# EAGLE board SrcBackplane01_7slots (EAGLE 7.7.0)
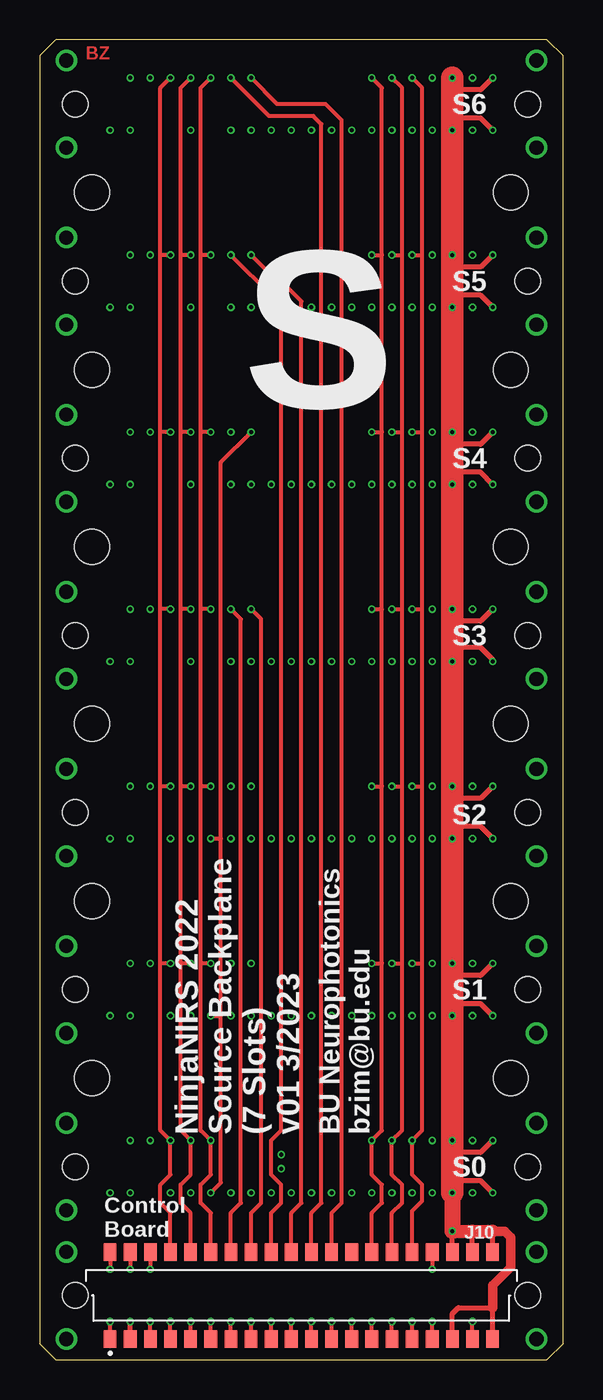
[diagram p0: board, top side]
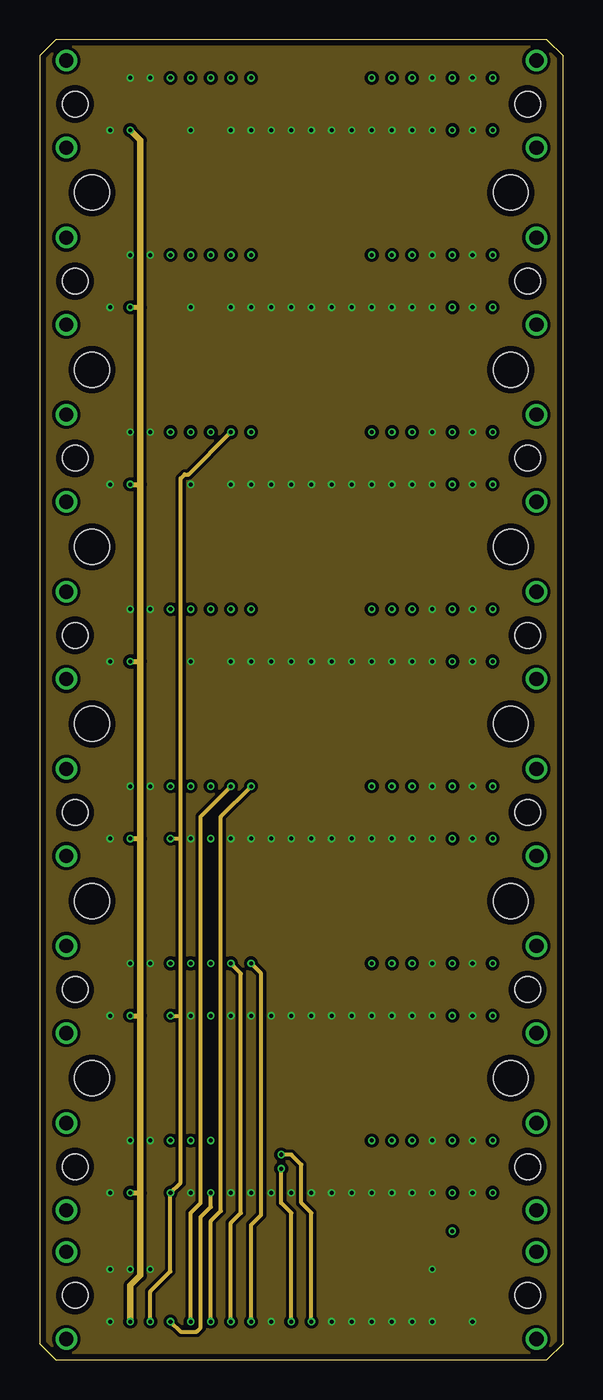
[diagram p1: board, inner layer Route2]
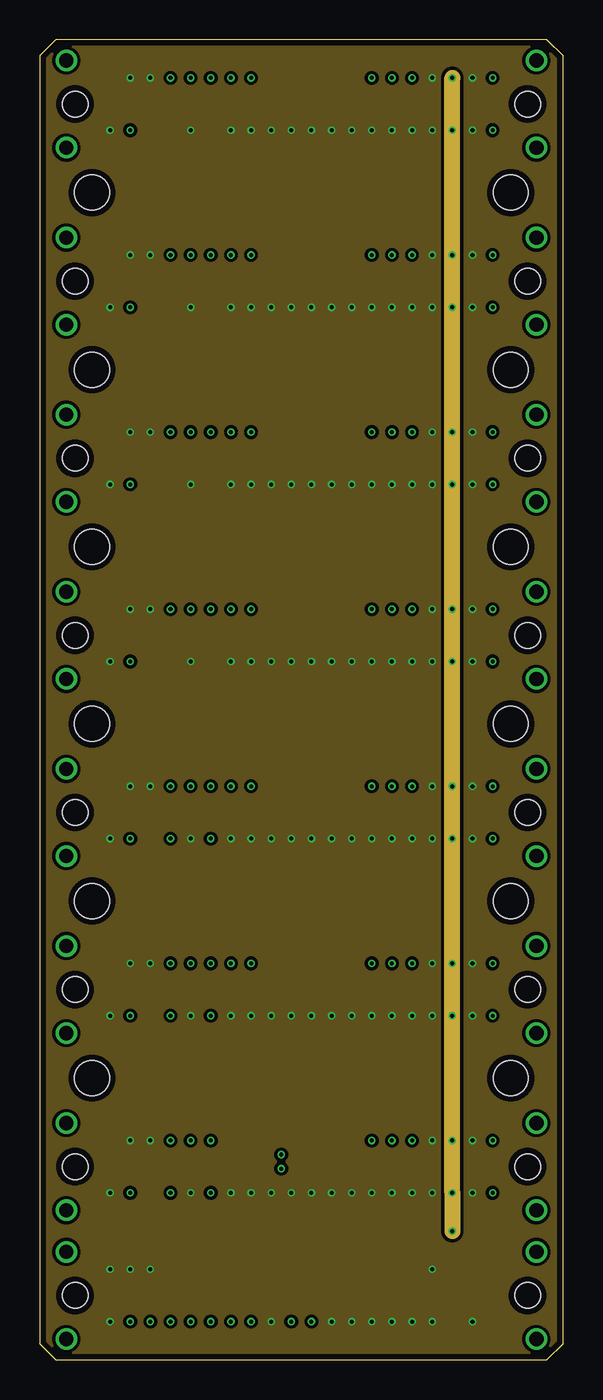
[diagram p2: board, inner layer Route15]
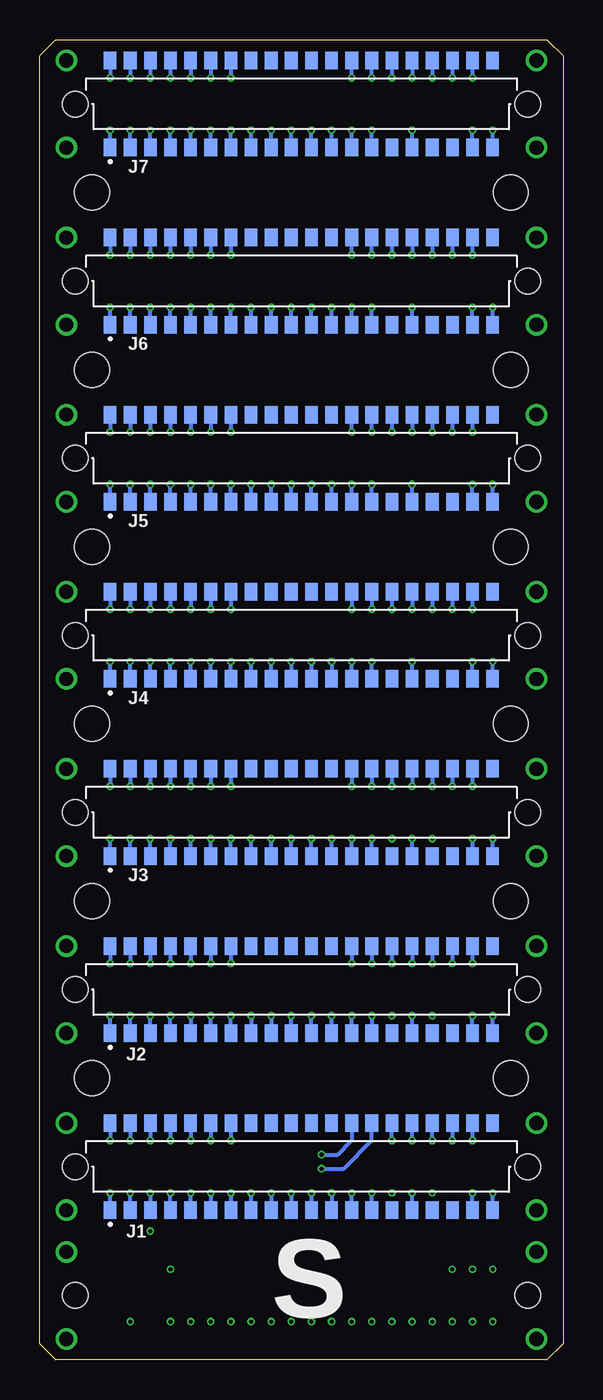
[diagram p3: board, bottom side, seen from below]

Size 33.02 x 83.31 mm. Coordinates in mm from the lower left corner, seen from the top.
Outline: 0,82.3 0,1.02 1.02,0 32,0 33.02,1.02 33.02,82.3 32,83.31 1.02,83.31 0,82.3
Copper layers (1*2*15*16): Top 0.035559375mm / dielectric 0.17018125mm / Route2 0.01778125mm / dielectric 47mil / Route15 0.01778125mm / dielectric 0.17018125mm / Bottom 0.035559375mm
Design rules "OSHPark-4layer *": minimum track width 5mil, minimum drill 10mil, track to track 5mil, track to pad 5mil, pad to pad 5mil, via to via 5mil, smd to smd 5mil, copper to edge 15mil, drill to drill 6mil, minimum pad ring 4mil, minimum via ring 4mil, stop-mask expansion 2.5mil, vias tented up to drill 12mil, thermal gap 10mil
Holes 2.2 mm at 3.3,40.13 3.3,28.96 3.3,17.78 29.72,40.13 29.72,28.96 29.72,17.78 29.72,51.31 29.72,62.48 29.72,73.66 3.3,51.31 3.3,62.48 3.3,73.66

## Footprints (pad centres in the part's own frame; a part is rotated, then mirrored left to right if it is on the bottom)
M20X2_HARFLEX_F_STR_MPTH = smd 0.8 x 1.1: A1 12.065,2.75; A2 10.795,2.75; A3 9.525,2.75; A4 8.255,2.75; A5 6.985,2.75; A6 5.715,2.75; A7 4.445,2.75; A8 3.175,2.75; A9 1.905,2.75; A10 0.635,2.75; A11 -0.635,2.75; A12 -1.905,2.75; A13 -3.175,2.75; A14 -4.445,2.75; A15 -5.715,2.75; A16 -6.985,2.75; A17 -8.255,2.75; A18 -9.525,2.75; A19 -10.795,2.75; A20 -12.065,2.75; B1 12.065,-2.75; B2 10.795,-2.75; B3 9.525,-2.75; B4 8.255,-2.75; B5 6.985,-2.75; B6 5.715,-2.75; B7 4.445,-2.75; B8 3.175,-2.75; B9 1.905,-2.75; B10 0.635,-2.75; B11 -0.635,-2.75; B12 -1.905,-2.75; B13 -3.175,-2.75; B14 -4.445,-2.75; B15 -5.715,-2.75; B16 -6.985,-2.75; B17 -8.255,-2.75; B18 -9.525,-2.75; B19 -10.795,-2.75; B20 -12.065,-2.75 | drill 0.9 pad 1.35: M1 -14.825,2.75; M2 14.825,2.75; M3 -14.825,-2.75; M4 14.825,-2.75 | hole 1.6: -14.275,0; 14.275,0

## Placement (x,y rotation side)
J1  M20X2_STR_MPTH  [M20X2_HARFLEX_F_STR_MPTH]  16.51,12.19 180 bottom
J2  M20X2_STR_MPTH  [M20X2_HARFLEX_F_STR_MPTH]  16.51,23.37 180 bottom
J3  M20X2_STR_MPTH  [M20X2_HARFLEX_F_STR_MPTH]  16.51,34.54 180 bottom
J4  M20X2_STR_MPTH  [M20X2_HARFLEX_F_STR_MPTH]  16.51,45.72 180 bottom
J5  M20X2_STR_MPTH  [M20X2_HARFLEX_F_STR_MPTH]  16.51,56.9 180 bottom
J6  M20X2_STR_MPTH  [M20X2_HARFLEX_F_STR_MPTH]  16.51,68.07 180 bottom
J7  M20X2_STR_MPTH  [M20X2_HARFLEX_F_STR_MPTH]  16.51,79.25 180 bottom
J10  M20X2_STR_MPTH  [M20X2_HARFLEX_F_STR_MPTH]  16.51,4.06 180 top

## Library data of the parts
J1-J7 J10 = MyLib

## Nets
COL00: J1.B13 J10.A11
COL01: J1.B14 J10.A10
COL02: J2.B13 J10.A8
COL03: J2.B14 J10.A7
COL04: J3.B13 J10.A6
COL05: J3.B14 J10.A5
COL06: J4.B13 J10.B8
COL07: J4.B14 J10.B7
COL08: J5.B13 J10.A4
COL09: J5.B14 J10.A3
COL10: J6.B13 J10.B10
COL11: J6.B14 J10.B9
COL12: J7.B13 J10.B12
COL13: J7.B14 J10.B11
GND: J1.A2 J1.A4 J1.A5 J1.A6 J1.A7 J1.A8 J1.A9 J1.A10 J1.A11 J1.A12 J1.A13 J1.A14 J1.A16 J1.A20 J1.B2 J1.B4 J1.B18 J1.B19 J2.A2 J2.A4 J2.A5 J2.A6 J2.A7 J2.A8 J2.A9 J2.A10 J2.A11 J2.A12 J2.A13 J2.A14 J2.A16 J2.A20 J2.B2 J2.B4 J2.B18 J2.B19 J3.A2 J3.A4 J3.A5 J3.A6 J3.A7 J3.A8 J3.A9 J3.A10 J3.A11 J3.A12 J3.A13 J3.A14 J3.A16 J3.A20 J3.B2 J3.B4 J3.B18 J3.B19 J4.A2 J4.A4 J4.A5 J4.A6 J4.A7 J4.A8 J4.A9 J4.A10 J4.A11 J4.A12 J4.A13 J4.A14 J4.A16 J4.A20 J4.B2 J4.B4 J4.B18 J4.B19 J5.A2 J5.A4 J5.A5 J5.A6 J5.A7 J5.A8 J5.A9 J5.A10 J5.A11 J5.A12 J5.A13 J5.A14 J5.A16 J5.A20 J5.B2 J5.B4 J5.B18 J5.B19 J6.A2 J6.A4 J6.A5 J6.A6 J6.A7 J6.A8 J6.A9 J6.A10 J6.A11 J6.A12 J6.A13 J6.A14 J6.A16 J6.A20 J6.B2 J6.B4 J6.B18 J6.B19 J7.A2 J7.A4 J7.A5 J7.A6 J7.A7 J7.A8 J7.A9 J7.A10 J7.A11 J7.A12 J7.A13 J7.A14 J7.A16 J7.A20 J7.B2 J7.B4 J7.B18 J7.B19 J10.A1 J10.A9 J10.A12 J10.A13 J10.A14 J10.A15 J10.A16 J10.A17 J10.A19 J10.B1 J10.B2 J10.B3 J10.B17
PWR0: J1.B15 J2.B15 J3.B15 J4.B15 J5.B15 J6.B15 J7.B15 J10.B6
PWR1: J1.B16 J2.B16 J3.B16 J4.B16 J5.B16 J6.B16 J7.B16 J10.B5
PWR2: J1.B17 J2.B17 J3.B17 J4.B17 J5.B17 J6.B17 J7.B17 J10.B4
ROW0: J1.B5 J2.B5 J3.B5 J4.B5 J5.B5 J6.B5 J7.B5 J10.B16
ROW1: J1.B6 J2.B6 J3.B6 J4.B6 J5.B6 J6.B6 J7.B6 J10.B15
ROW2: J1.B7 J2.B7 J3.B7 J4.B7 J5.B7 J6.B7 J7.B7 J10.B14
SPARE: J10.B13
V5P1: J1.A1 J1.A3 J1.B1 J1.B3 J2.A1 J2.A3 J2.B1 J2.B3 J3.A1 J3.A3 J3.B1 J3.B3 J4.A1 J4.A3 J4.B1 J4.B3 J5.A1 J5.A3 J5.B1 J5.B3 J6.A1 J6.A3 J6.B1 J6.B3 J7.A1 J7.A3 J7.B1 J7.B3 J10.A18 J10.A20 J10.B18 J10.B19 J10.B20
VN3P4: J1.A19 J2.A19 J3.A19 J4.A19 J5.A19 J6.A19 J7.A19 J10.A2

## Tracks (layer width: path | path; a pad name or v marks a point on that pad's centre or on a via)
COL00  (via drill 0.25)
  Top 0.254: J10.A11 v17.14,2.41
  Route2 0.254: v17.14,2.41 17.14,9.27 16.51,9.91 16.51,12.32 15.88,12.95 v15.24,12.95
  Bottom 0.254: J1.B13 13.34,13.84 14.22,12.95 v15.24,12.95
COL01  (via drill 0.25)
  Top 0.254: J10.A10 v15.88,2.41
  Route2 0.254: v15.88,2.41 15.88,9.27 15.24,9.91 v15.24,12.06
  Bottom 0.254: J1.B14 12.06,13.84 13.84,12.06 v15.24,12.06
COL02  (via drill 0.25)
  Top 0.254: J10.A8 v13.34,2.41
  Route2 0.254: v13.34,2.41 13.34,8.51 13.97,9.14 13.97,24.38 v13.34,25.02
  Bottom 0.254: J2.B13 v13.34,25.02
COL03  (via drill 0.25)
  Top 0.254: J10.A7 v12.06,2.41
  Route2 0.254: v12.06,2.41 12.06,8.64 12.7,9.27 12.7,24.38 v12.06,25.02
  Bottom 0.254: J2.B14 v12.06,25.02
COL04  (via drill 0.25)
  Top 0.254: J10.A6 v10.79,2.41
  Route2 0.254: v10.79,2.41 10.79,8.76 11.43,9.4 11.43,34.29 v13.34,36.2
  Bottom 0.254: J3.B13 v13.34,36.2
COL05  (via drill 0.25)
  Top 0.254: J10.A5 v9.53,2.41
  Route2 0.254: v9.53,2.41 9.53,9.27 10.16,9.91 10.16,34.29 v12.06,36.2
  Bottom 0.254: J3.B14 v12.06,36.2
COL06  (via drill 0.25)
  Top 0.254: J10.B8 13.34,9.27 13.97,9.91 13.97,46.74 v13.34,47.37
  Bottom 0.254: J4.B13 v13.34,47.37
COL07  (via drill 0.25)
  Top 0.254: J10.B7 12.06,9.27 12.7,9.91 12.7,46.74 v12.06,47.37
  Bottom 0.254: J4.B14 v12.06,47.37
COL08  (via drill 0.25)
  Top 0.254: v10.79,10.54 11.43,11.18 11.43,21.72 | 11.43,21.72 11.43,32.89 | v10.79,32.89 11.43,32.89 | v10.79,21.72 11.43,21.72 | J10.A4 v8.26,2.41 | 11.43,32.89 11.43,56.64 v13.34,58.55
  Route2 0.254: v8.26,2.41 8.89,1.78 9.91,1.78 10.16,2.03 10.16,9.02 10.79,9.65 v10.79,10.54
  Bottom 0.254: v13.34,58.55 J5.B13
COL09  (via drill 0.25)
  Top 0.254: J10.A3 v6.99,2.41
  Route2 0.254: v6.99,2.41 6.99,4.32 8.26,5.59 v8.26,10.54 8.89,11.18 8.89,21.72 | 8.89,21.72 8.89,32.89 | v8.26,32.89 8.89,32.89 | v8.26,21.72 8.89,21.72 | 8.89,32.89 8.89,55.63 9.14,55.88 9.4,55.88 v12.06,58.55
  Bottom 0.254: v12.06,58.55 J5.B14
COL10  (via drill 0.25)
  Top 0.254: J10.B10 15.88,9.27 16.51,9.91 16.51,66.8 15.75,67.56 15.49,67.56 v13.34,69.72
  Bottom 0.254: v13.34,69.72 J6.B13
COL11  (via drill 0.25)
  Top 0.254: J10.B9 14.61,9.27 15.24,9.91 15.24,11.05 14.61,11.68 14.61,13.84 15.24,14.48 15.24,66.67 14.86,67.06 14.73,67.06 v12.06,69.72
  Bottom 0.254: v12.06,69.72 J6.B14
COL12  (via drill 0.25)
  Top 0.254: J10.B12 18.41,9.27 19.05,9.91 19.05,78.23 18.03,79.25 14.99,79.25 v13.34,80.9
  Bottom 0.254: v13.34,80.9 J7.B13
COL13  (via drill 0.25)
  Top 0.254: J10.B11 17.14,9.27 17.78,9.91 17.78,77.98 17.27,78.49 14.48,78.49 v12.06,80.9
  Bottom 0.254: v12.06,80.9 J7.B14
GND  (via drill 0.25)
  Top 0.254: J10.A14 v20.95,2.41 | J10.A19 v27.3,2.41 | J10.A17 v24.77,2.41 | J10.A16 v23.5,2.41 | J10.A15 v22.23,2.41 | J10.A13 v19.68,2.41 | J10.A12 v18.41,2.41 | J10.B17 v24.77,5.71 | J10.A1 v4.45,2.41 | J10.B1 v4.45,5.71 | J10.B2 v5.71,5.71 | J10.B3 v6.99,5.71 | J10.A9 v14.61,2.41
  Bottom 0.254: J4.B19 v5.71,47.37 | J4.B18 v6.99,47.37 | J4.B4 v24.77,47.37 | J4.B2 v27.3,47.37 | J4.A2 v27.3,44.07 | J4.A4 v24.77,44.07 | J4.A5 v23.5,44.07 | J4.A6 v22.23,44.07 | J4.A7 v20.95,44.07 | J4.A8 v19.68,44.07 | J4.A9 v18.41,44.07 | v17.14,44.07 J4.A10 | v15.88,44.07 J4.A11 | v14.61,44.07 J4.A12 | J4.A13 v13.34,44.07 | J4.A14 v12.06,44.07 | J4.A16 v9.53,44.07 | J4.A20 v4.45,44.07 | J3.A20 v4.45,32.89 | J3.A16 v9.53,32.89 | J3.B18 v6.99,36.2 | J3.B4 v24.77,36.2 | J3.B2 v27.3,36.2 | J3.A2 v27.3,32.89 | J3.A4 v24.77,32.89 | J3.A5 v23.5,32.89 | J3.A6 v22.23,32.89 | J3.A7 v20.95,32.89 | J3.A8 v19.68,32.89 | J3.A9 v18.41,32.89 | J3.A10 v17.14,32.89 | J3.A11 v15.88,32.89 | J3.A12 v14.61,32.89 | J3.A13 v13.34,32.89 | J3.A14 v12.06,32.89 | J3.B19 v5.71,36.2 | J2.B2 v27.3,25.02 | J2.B4 v24.77,25.02 | J2.A2 v27.3,21.72 | J2.A4 v24.77,21.72 | v23.5,21.72 J2.A5 | J2.A6 v22.23,21.72 | J2.A7 v20.95,21.72 | v19.68,21.72 J2.A8 | v18.41,21.72 J2.A9 | J2.A10 v17.14,21.72 | J2.A11 v15.88,21.72 | J2.A12 v14.61,21.72 | J2.A13 v13.34,21.72 | v12.06,21.72 J2.A14 | J2.A16 v9.53,21.72 | J2.B18 v6.99,25.02 | J2.B19 v5.71,25.02 | J1.B2 v27.3,13.84 | J1.B4 v24.77,13.84 | J1.A2 v27.3,10.54 | J1.A4 v24.77,10.54 | J1.A5 v23.5,10.54 | v22.23,10.54 J1.A6 | v20.95,10.54 J1.A7 | v18.41,10.54 J1.A9 | v17.14,10.54 J1.A10 | v15.88,10.54 J1.A11 | v14.61,10.54 J1.A12 | J1.A13 v13.34,10.54 | J1.A14 v12.06,10.54 | J1.B18 v6.99,13.84 | J1.B19 v5.71,13.84 | J1.A16 v9.53,10.54 | J1.A20 v4.45,10.54 | J2.A20 v4.45,21.72 | J5.A2 v27.3,55.24 | J5.A4 v24.77,55.24 | J5.A5 v23.5,55.24 | J5.A6 v22.23,55.24 | J5.A7 v20.95,55.24 | J5.A8 v19.68,55.24 | J5.A9 v18.41,55.24 | J5.A10 v17.14,55.24 | J5.A11 v15.88,55.24 | J5.A12 v14.61,55.24 | J5.A13 v13.34,55.24 | J5.A14 v12.06,55.24
  Bottom 0.254: J5.A20 v4.45,55.24 | J5.B18 v6.99,58.55 | J5.B19 v5.71,58.55 | J5.B4 v24.77,58.55 | J5.B2 v27.3,58.55 | J6.B4 v24.77,69.72 | J6.B2 v27.3,69.72 | J6.A2 v27.3,66.42 | J6.A4 v24.77,66.42 | J6.A5 v23.5,66.42 | J6.A6 v22.23,66.42 | J6.A7 v20.95,66.42 | J6.A8 v19.68,66.42 | J6.A9 v18.41,66.42 | J6.A10 v17.14,66.42 | J6.A11 v15.88,66.42 | J6.A12 v14.61,66.42 | J6.A13 v13.34,66.42 | J6.A14 v12.06,66.42 | J6.A16 v9.53,66.42 | J6.B18 v6.99,69.72 | J6.B19 v5.71,69.72 | J6.A20 v4.45,66.42 | J7.B4 v24.77,80.9 | J7.B2 v27.3,80.9 | J7.A2 v27.3,77.6 | J7.A4 v24.77,77.6 | J7.A5 v23.5,77.6 | J7.A6 v22.23,77.6 | J7.A7 v20.95,77.6 | J7.A8 v19.68,77.6 | J7.A9 v18.41,77.6 | J7.A10 v17.14,77.6 | J7.A11 v15.88,77.6 | J7.A12 v14.61,77.6 | J7.A13 v13.34,77.6 | J7.A14 v12.06,77.6 | J7.A16 v9.53,77.6 | J7.B19 v5.71,80.9 | J7.B18 v6.99,80.9 | J7.A20 v4.45,77.6 | J5.A16 v9.53,55.24 | J1.A8 v19.68,10.54
  pour Route15 (isolate 0.203, rank 2): 0,83.31 33.02,83.31 33.02,0 0,0
  pour Route2 (isolate 0.203, rank 2): 0,83.31 33.02,83.31 33.02,0 0,0
PWR0  (via drill 0.25)
  Top 0.254: J10.B6 10.79,9.27 10.16,9.91 10.16,11.05 10.79,11.68 v10.79,13.84 10.16,14.48 10.16,25.02 | 10.16,25.02 10.16,36.2 | v10.79,36.2 10.16,36.2 | v10.79,25.02 10.16,25.02 | 10.16,36.2 10.16,47.37 | 10.16,47.37 10.16,58.55 | 10.16,58.55 10.16,69.72 | 10.16,69.72 10.16,80.26 v10.79,80.9 | v10.79,69.72 10.16,69.72 | v10.79,58.55 10.16,58.55 | v10.79,47.37 10.16,47.37
  Bottom 0.254: J4.B15 v10.79,47.37 | J3.B15 v10.79,36.2 | J2.B15 v10.79,25.02 | v10.79,13.84 J1.B15 | J6.B15 v10.79,69.72 | J5.B15 v10.79,58.55 | J7.B15 v10.79,80.9
PWR1  (via drill 0.25)
  Top 0.254: J10.B5 9.53,9.27 8.89,9.91 8.89,11.05 9.53,11.68 v9.53,13.84 8.89,14.48 8.89,25.02 | 8.89,25.02 8.89,36.2 | v9.53,36.2 8.89,36.2 | v9.53,25.02 8.89,25.02 | 8.89,36.2 8.89,47.37 | 8.89,47.37 8.89,58.55 | 8.89,58.55 8.89,69.72 | 8.89,69.72 8.89,80.26 v9.53,80.9 | v9.53,69.72 8.89,69.72 | v9.53,58.55 8.89,58.55 | v9.53,47.37 8.89,47.37
  Bottom 0.254: J4.B16 v9.53,47.37 | J3.B16 v9.53,36.2 | J2.B16 v9.53,25.02 | v9.53,13.84 J1.B16 | J6.B16 v9.53,69.72 | J5.B16 v9.53,58.55 | J7.B16 v9.53,80.9
PWR2  (via drill 0.25)
  Top 0.254: J10.B4 8.26,9.27 7.62,9.91 7.62,11.05 8.26,11.68 v8.26,13.84 7.62,14.48 7.62,25.02 | 7.62,25.02 7.62,36.2 | v8.26,36.2 7.62,36.2 | v8.26,25.02 7.62,25.02 | 7.62,36.2 7.62,47.37 | 7.62,47.37 7.62,58.55 | 7.62,58.55 7.62,69.72 | 7.62,69.72 7.62,80.26 v8.26,80.9 | v8.26,69.72 7.62,69.72 | v8.26,58.55 7.62,58.55 | v8.26,47.37 7.62,47.37
  Bottom 0.254: J4.B17 v8.26,47.37 | J3.B17 v8.26,36.2 | J2.B17 v8.26,25.02 | v8.26,13.84 J1.B17 | J6.B17 v8.26,69.72 | J5.B17 v8.26,58.55 | J7.B17 v8.26,80.9
ROW0  (via drill 0.25)
  Top 0.254: J10.B16 23.5,9.4 24.13,10.03 24.13,11.05 23.5,11.68 v23.5,13.84 24.13,14.48 24.13,25.02 | 24.13,25.02 24.13,36.2 | v23.5,36.2 24.13,36.2 | v23.5,25.02 24.13,25.02 | 24.13,36.2 24.13,47.37 | 24.13,47.37 24.13,58.55 | 24.13,58.55 24.13,69.72 | 24.13,69.72 24.13,80.26 v23.5,80.9 | v23.5,47.37 24.13,47.37 | v23.5,58.55 24.13,58.55 | v23.5,69.72 24.13,69.72
  Bottom 0.254: J4.B5 v23.5,47.37 | J3.B5 v23.5,36.2 | J2.B5 v23.5,25.02 | J1.B5 v23.5,13.84 | J7.B5 v23.5,80.9 | J6.B5 v23.5,69.72 | J5.B5 v23.5,58.55
ROW1  (via drill 0.25)
  Top 0.254: J10.B15 22.23,9.27 22.86,9.91 22.86,11.05 22.23,11.68 v22.23,13.84 22.86,14.48 22.86,25.02 | 22.86,25.02 22.86,36.2 | v22.23,36.2 22.86,36.2 | v22.23,25.02 22.86,25.02 | 22.86,36.2 22.86,47.37 | 22.86,47.37 22.86,58.55 | 22.86,58.55 22.86,69.72 | 22.86,69.72 22.86,80.26 v22.23,80.9 | v22.23,47.37 22.86,47.37 | v22.23,58.55 22.86,58.55 | v22.23,69.72 22.86,69.72
  Bottom 0.254: J4.B6 v22.23,47.37 | J3.B6 v22.23,36.2 | J2.B6 v22.23,25.02 | J1.B6 v22.23,13.84 | J7.B6 v22.23,80.9 | J6.B6 v22.23,69.72 | J5.B6 v22.23,58.55
ROW2  (via drill 0.25)
  Top 0.254: J10.B14 20.95,9.27 21.59,9.91 21.59,11.05 20.95,11.68 v20.95,13.84 21.59,14.48 21.59,25.02 | 21.59,25.02 21.59,36.2 | v20.95,36.2 21.59,36.2 | v20.95,25.02 21.59,25.02 | 21.59,36.2 21.59,47.37 | 21.59,47.37 21.59,58.55 | 21.59,58.55 21.59,69.72 | 21.59,69.72 21.59,80.26 v20.95,80.9 | v20.95,47.37 21.59,47.37 | v20.95,58.55 21.59,58.55 | v20.95,69.72 21.59,69.72
  Bottom 0.254: J4.B7 v20.95,47.37 | J3.B7 v20.95,36.2 | J2.B7 v20.95,25.02 | J1.B7 v20.95,13.84 | J7.B7 v20.95,80.9 | J6.B7 v20.95,69.72 | J5.B7 v20.95,58.55
V5P1  (via drill 0.25)
  Top 0.305: v28.57,47.37 27.81,46.61 26.04,46.61 | v28.57,44.07 28.57,44.2 27.81,44.96 26.04,44.96 | v28.57,36.2 27.81,35.43 26.04,35.43 | v28.57,32.89 27.81,33.66 26.04,33.66 | v28.57,25.02 27.81,24.26 26.04,24.26 | v28.57,21.72 27.81,22.48 26.04,22.48 | v28.57,13.84 27.81,13.08 26.04,13.08 | v28.57,10.54 27.81,11.3 26.04,11.3 | J10.B18 v26.04,8.13 | J10.B19 27.3,8.13 | J10.B20 28.57,8.13 | J10.A20 28.57,3.3 26.42,3.3 26.04,2.92 J10.A18 | v28.57,55.24 27.81,56.01 26.04,56.01 | v28.57,58.55 27.81,57.78 26.04,57.78 | v28.57,69.72 27.81,68.96 26.04,68.96 | v28.57,66.42 27.81,67.18 26.04,67.18 | v28.57,80.9 27.81,80.14 26.04,80.14 | v28.57,77.6 27.81,78.36 26.04,78.36
  Top 0.61: 28.57,3.3 28.57,4.7 29.72,5.84 29.72,7.75 29.34,8.13 28.57,8.13
  Top 0.813: v26.04,8.13 27.3,8.13 28.57,8.13
  Top 1.016: v26.04,10.54 v26.04,8.13
  Top 1.422: v26.04,10.54 26.04,11.3 26.04,13.08 v26.04,13.84 v26.04,21.72 26.04,22.48 26.04,24.26 v26.04,25.02 v26.04,32.89 26.04,33.66 26.04,35.43 v26.04,36.2 v26.04,44.07 26.04,44.96 26.04,46.61 v26.04,47.37 v26.04,55.24 26.04,56.01 26.04,57.78 v26.04,58.55 v26.04,66.42 26.04,67.18 26.04,68.96 v26.04,69.72 v26.04,77.6 26.04,78.36 26.04,80.14 v26.04,80.9
  Route15 1.016: v26.04,80.9 v26.04,10.54 v26.04,8.13
  Bottom 0.254: J4.B3 v26.04,47.37 | J4.B1 v28.57,47.37 | J4.A1 v28.57,44.07 | J4.A3 v26.04,44.07 | J3.B3 v26.04,36.2 | J3.B1 v28.57,36.2 | J3.A1 v28.57,32.89 | J3.A3 v26.04,32.89 | J2.B3 v26.04,25.02 | J2.B1 v28.57,25.02 | J2.A3 v26.04,21.72 | J2.A1 v28.57,21.72 | J1.B3 v26.04,13.84 | J1.B1 v28.57,13.84 | J1.A1 v28.57,10.54 | v26.04,10.54 J1.A3 | J5.A3 v26.04,55.24 | J5.A1 v28.57,55.24 | J5.B3 v26.04,58.55 | J5.B1 v28.57,58.55 | J6.B1 v28.57,69.72 | J6.B3 v26.04,69.72 | J6.A1 v28.57,66.42 | J6.A3 v26.04,66.42 | J7.B1 v28.57,80.9 | J7.B3 v26.04,80.9 | J7.A1 v28.57,77.6 | J7.A3 v26.04,77.6
VN3P4  (via drill 0.25)
  Top 0.305: J10.A2 v5.71,2.41
  Route2 0.305: v5.71,32.89 6.35,32.89 | v5.71,21.72 6.35,21.72 | v5.71,10.54 6.35,10.54 | v5.71,66.42 6.35,66.42 | v5.71,55.24 6.35,55.24 | v5.71,44.07 6.35,44.07
  Route2 0.406: v5.71,2.41 5.71,4.7 6.35,5.33 6.35,10.54 6.35,21.72 6.35,32.89 6.35,44.07 6.35,55.24 6.35,66.42 6.35,76.96 v5.71,77.6
  Bottom 0.254: J4.A19 v5.71,44.07 | v5.71,32.89 J3.A19 | J1.A19 v5.71,10.54 | J2.A19 v5.71,21.72 | J5.A19 v5.71,55.24 | J6.A19 v5.71,66.42 | J7.A19 v5.71,77.6

## Text on the board
Top: BZ
tPlace: S6 | S5 | S | S4 | S3 | S2 | S1 | NinjaNIRS 2022 / Source Backplane / (7 Slots) / v01 3/2023 | BU Neurophotonics / bzim@bu.edu | S0 | Control / Board
bPlace: S